# EAGLE board PE RM (EAGLE 7.6.0)
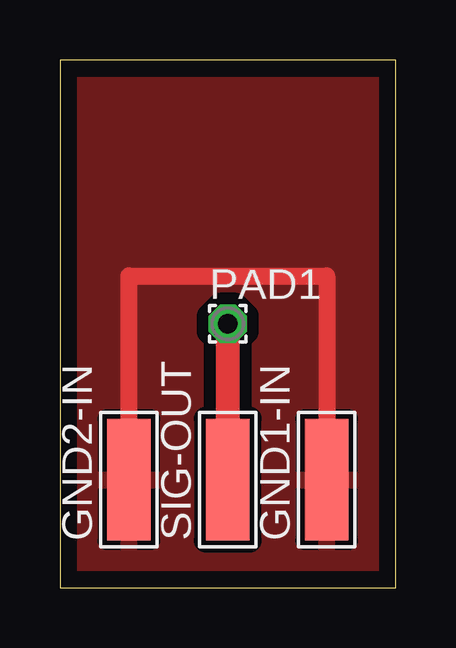
[diagram p0: board, top side]
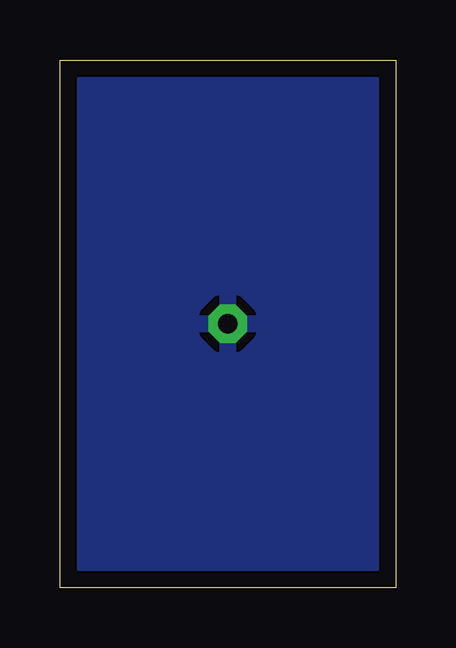
[diagram p1: board, bottom side, seen from below]

Size 14 x 22 mm. Coordinates in mm from the lower left corner, seen from the top.
Outline: 0,0 14,0 14,22 0,22 0,0
Copper layers (1*16): Top 0.035mm / dielectric 1.5mm / Bottom 0.035mm
Design rules "default *": minimum track width 10mil, minimum drill 24mil, track to track 8mil, track to pad 8mil, pad to pad 8mil, via to via 8mil, smd to smd 8mil, copper to edge 0.7mm, drill to drill 8mil, minimum pad ring 10mil, minimum via ring 8mil, stop-mask expansion 4mil, vias tented up to drill 0mil, thermal gap 0.4mm

## Footprints (pad centres in the part's own frame; a part is rotated, then mirrored left to right if it is on the bottom)
5-1,8 = smd 1.829 x 5.08: 1 0,0
1,6/0,8 = drill 0.813 pad 1.6 octagon: 1 0,0

## Placement (x,y rotation side)
GND1-IN  WIREPADSMD5-1,8  [5-1,8]  11.12,4.5 0 top
GND2-IN  WIREPADSMD5-1,8  [5-1,8]  2.88,4.5 0 top
PAD1  WIREPAD1,6/0,8  [1,6/0,8]  7,11 0 top
SIG-OUT  WIREPADSMD5-1,8  [5-1,8]  7,4.5 0 top

## Library data of the parts
GND1-IN GND2-IN PAD1 SIG-OUT = wirepad

## Nets
GND: GND1-IN.1 GND2-IN.1
SIG: PAD1.1 SIG-OUT.1

## Tracks (layer width: path | path; a pad name or v marks a point on that pad's centre or on a via)
GND
  Top 0.7: GND2-IN.1 2.88,13 11.12,13 GND1-IN.1
  pour Top (isolate 0.5): 14,0 14,22 0,22 0,0
SIG
  Top 1: SIG-OUT.1 PAD1.1
  pour Bottom (isolate 0.5): 14,0 0,0 0,22 14,22